# Altium PCB PCB1.PcbDoc
Units mil, origin at the board's own origin, x right, y up, seen from the top; angles counter-clockwise.
Board outline 1515 x 935 mil, 2 copper layers (Component Side, Bottom Layer), stack 12.8 mil thick; 7 components, 7 nets, 20 pads, 0 vias.
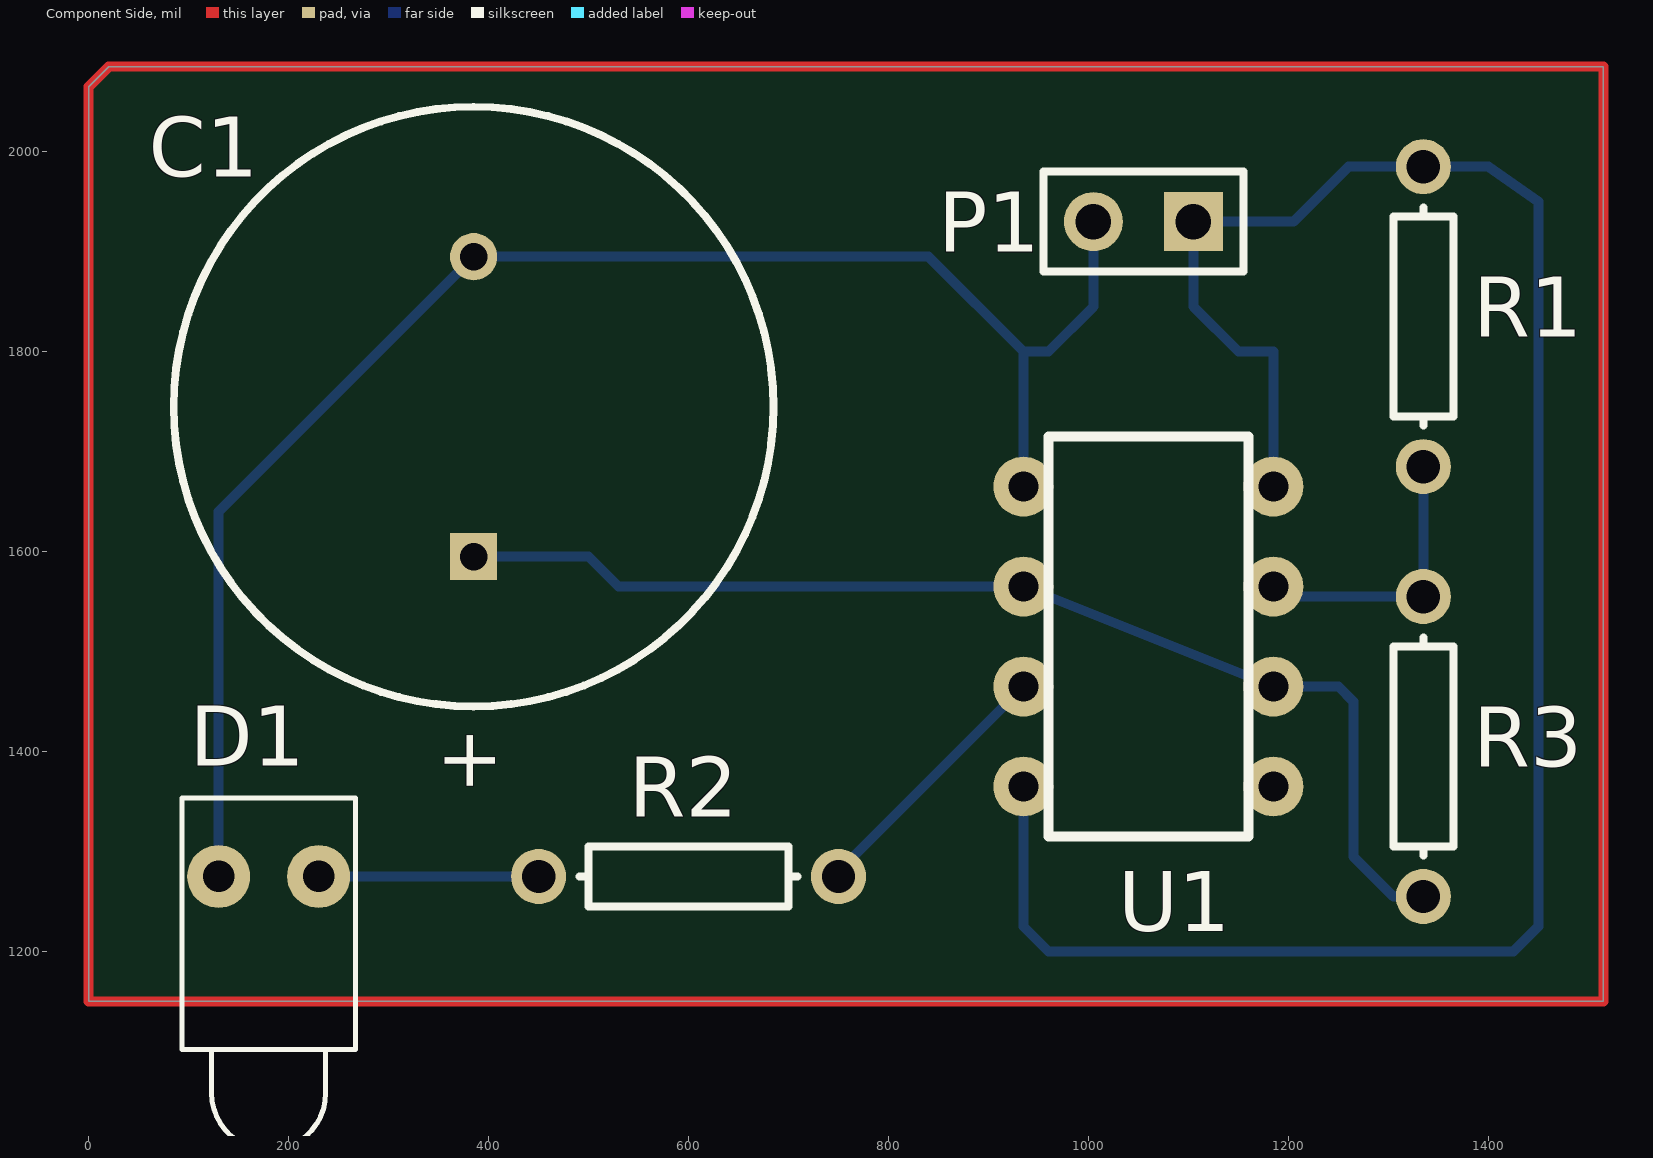
[diagram p0: Component Side view]
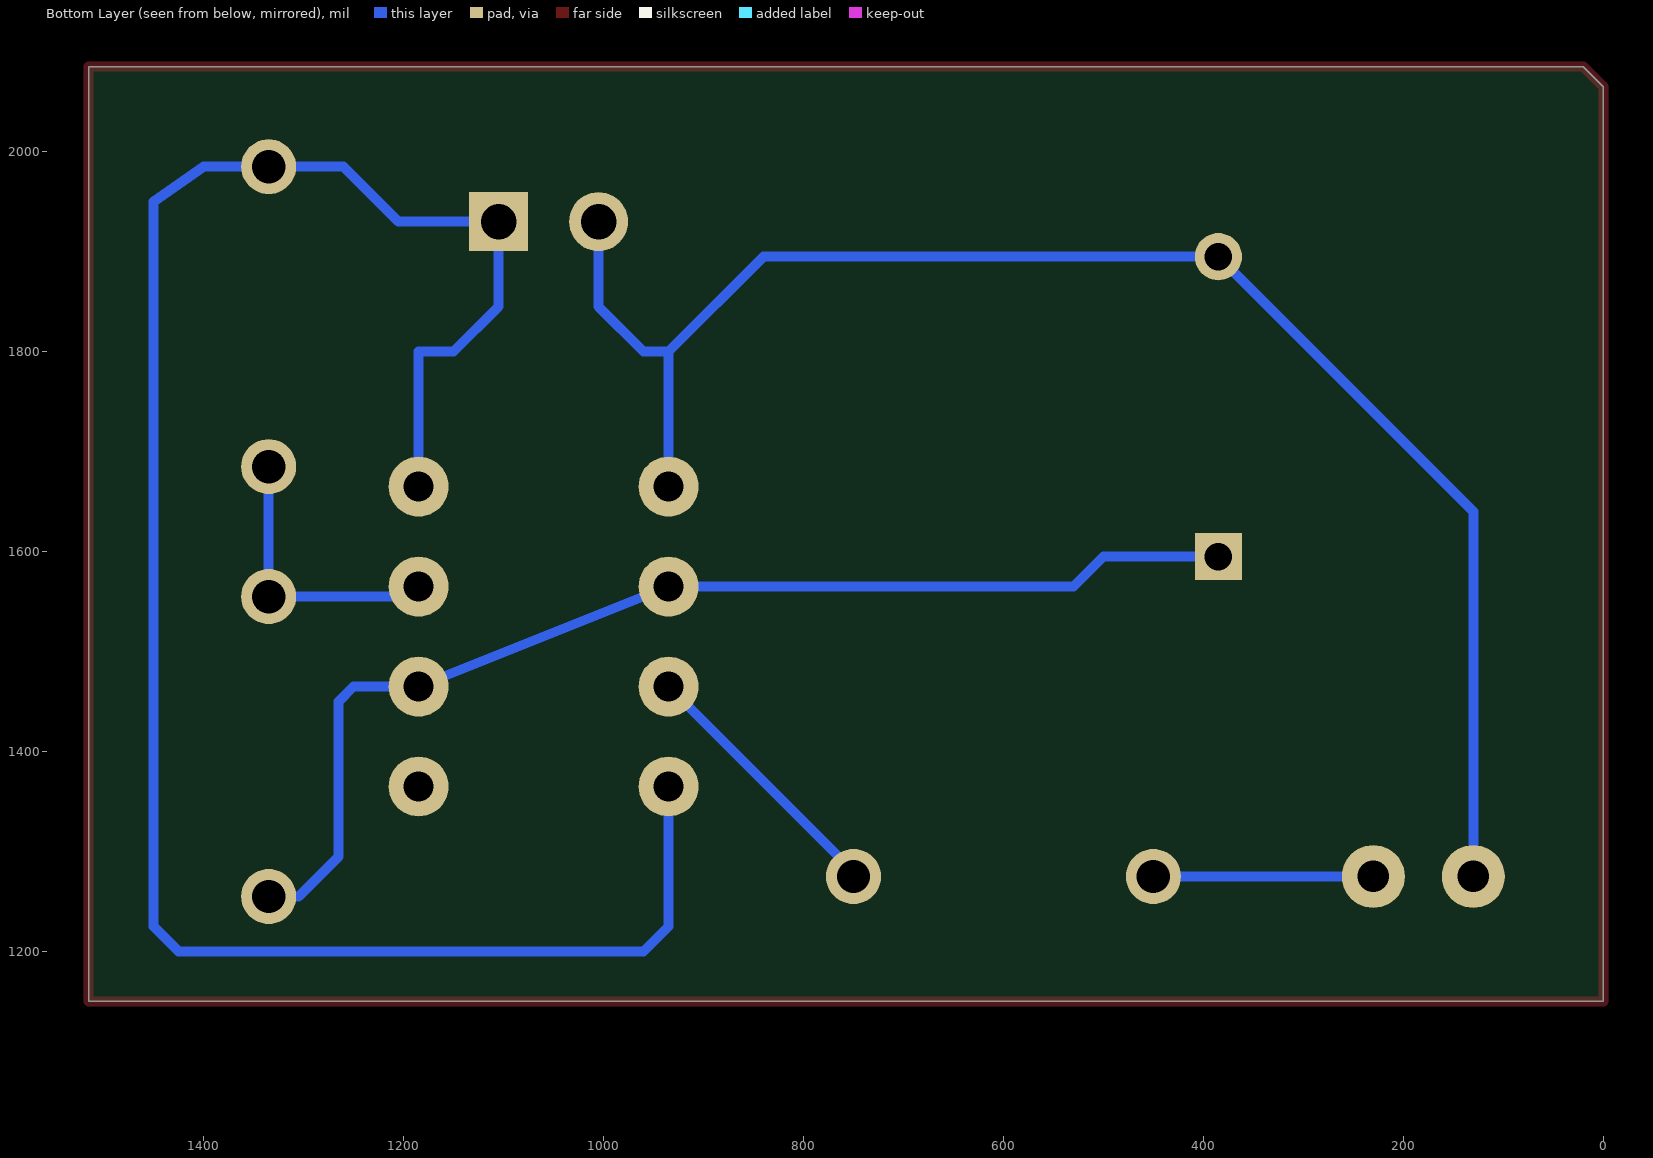
[diagram p1: Bottom Layer view, seen from below]

## Layer stack, top to bottom
Top Solder: solder mask 0.4, Solder Resist, Dk 3.5
Component Side: signal copper 1.4
Dielectric 1: core 10, FR-4, Dk 4.2
Bottom Layer: signal copper 1.4
Solder Side: solder mask 0.4, Solder Resist, Dk 3.5

## Board outline
0,1150 1515,1150 1515,2085 20,2085 0,2065

## Design rules (kind name [scope] priority, off if disabled: settings)
Clearance [All] p1: gap=10
PolygonConnect [All] p1: connectstyle=Relief reliefconductorwidth=10 reliefentries=4 polygonreliefangle="90 Angle" airgapwidth=10
RoomDefinition Sheet1 [InComponentClass('Sheet1')] p1: confinementstyle=ConfineIn formatcopy=TRUE lockcomponents=FALSE outline 20,1180 1490,1180 1490,2055 20,2055
RoutingVias [All] p1: holewidth=28 width=50 viastyle="Through Hole" minholewidth=28 minwidth=50 maxholewidth=28 maxwidth=50
SolderMaskExpansion [All] p1: expansion=4
Width [All] p1: maxlimit=10 minlimit=10 preferedwidth=10
30 further rules are at their usual default settings.

## Components (designator, comment, footprint, x,y, rotation, side; value= is the part's Value field where it differs from the comment)
C1 "Cap Pol1" RB7.6-15 385,1745 r270 top
D1 "LED1" LED-1 180,1275 r270 top
P1 "Header 2" HDR1X2 1105,1930 r180 top
R1 "Res1" AXIAL-0.3 1335,1835 r90 top
R2 "Res1" AXIAL-0.3 600,1275 r0 top
R3 "Res1" AXIAL-0.3 1335,1405 r90 top
U1 "LM555" LM555DIP 935,1665 r270 top

## Footprints (in the part's own frame and the unit in brackets; to place one, negate y for a bottom-side part, rotate by r counter-clockwise, add the part's x,y. Pads: shape width x height; smd on the part's side, far side on the other; paste and mask are expansions set on the pad)
AXIAL-0.3 [mm] "Axial Device, Thru-Hole; 2 Leads; 0.3 in Pin Spacing"
  round 1.4 hole 0.85: 1(-3.81,0) 2(3.81,0)
  silkscreen extent -2.77,-0.76 2.77,0.76
HDR1X2 [mm] "Connector; Header; 2 Position"
  rect 1.5x1.5 hole 0.9: 1(0,0)
  round 1.5 hole 0.9: 2(2.54,0)
  silkscreen extent -1.27,-1.27 3.81,1.27
LED-1 [mm] "LED; 2 Leads"
  round 1.6 hole 0.8: 1(0,1.27) 2(0,-1.27)
  silkscreen extent -2,-2.2 6.95,2.2
LM555DIP [mil] "LM555 DIP IC"
  round 60 hole 30: 1(0,0) 2(100,0) 3(200,0) 4(300,0) 5(300,250) 6(200,250) 7(100,250) 8(0,250)
  silkscreen extent -50,25 350,225
RB7.6-15 [mm] "Polarized Capacitor (Radial); 2 Leads"
  rect 1.2x1.2 hole 0.7: 1(3.81,0)
  round 1.2 hole 0.7: 2(-3.81,0)
  silkscreen extent -7.62,-7.62 7.62,7.62

## Part data
C1: "Polarized Capacitor (Radial)"
D1: "Typical RED GaAs LED"
P1: "Header, 2-Pin"
R1 R2 R3: "Resistor"
U1: "LM555 Timer DIP IC"

## Nets (pads, with @x,y where several pads share a name; then routed paths per layer and width w, separated by ;. In a path a pad name is that pad's centre, name@x,y a point inside that pad or via, vN(x,y) a via of type N, cw(c..) or ccw(c..) an arc to the next point about the centre after c; other vN are vias at no path point)
CONT: U1.5
DSCH: R1.1 R3.2 U1.7 | length 290
  Bottom Layer w10: U1.7 1185,1555 R3.2 R1.1
GND: C1.2 D1.2 P1.2 U1.1 | length 1623.6
  Bottom Layer w10: D1.2 130,1640 C1.2 840,1895 935,1800 ; U1.1 935,1800 ; P1.2 1005,1845 960,1800 935,1800
NetD1_1: D1.1 R2.1 | length 220
  Bottom Layer w10: D1.1 R2.1
NetR2_2: R2.2 U1.3 | length 266.6
  Bottom Layer w10: R2.2 750,1280 U1.3
THRSH: C1.1 R3.1 U1.2 U1.6 | length 1159.5
  Bottom Layer w10: C1.1 500,1595 530,1565 U1.2 U1.6 1250,1465 1265,1450 1265,1295 1305,1255 R3.1
"VCC +9": P1.1 R1.2 U1.4 U1.8 | length 2098.2
  Bottom Layer w10: U1.4 935,1225 960,1200 1425,1200 1450,1225 1450,1950 1400,1985 R1.2 1260,1985 1205,1930 P1.1 1105,1845 1150,1800 1185,1800 U1.8
copper on no net: | length 4888.3
  Component Side w10: 0,1150 0,2065 20,2085 1515,2085 1515,1150 0,1150

## Text inside footprints (layer, text, board x,y; h text height)
C1: Top Overlay "+" at 355.99,1424.85 h59.06 r270